# Altium PCB Upper Steer By Wire.PcbDoc
Units mm, origin at the board's own origin, x right, y up, seen from the top; angles counter-clockwise.
Board outline 70 x 50 mm, 2 copper layers (Top Layer, Bottom Layer); 11 components, 20 nets, 106 pads, 4 vias.
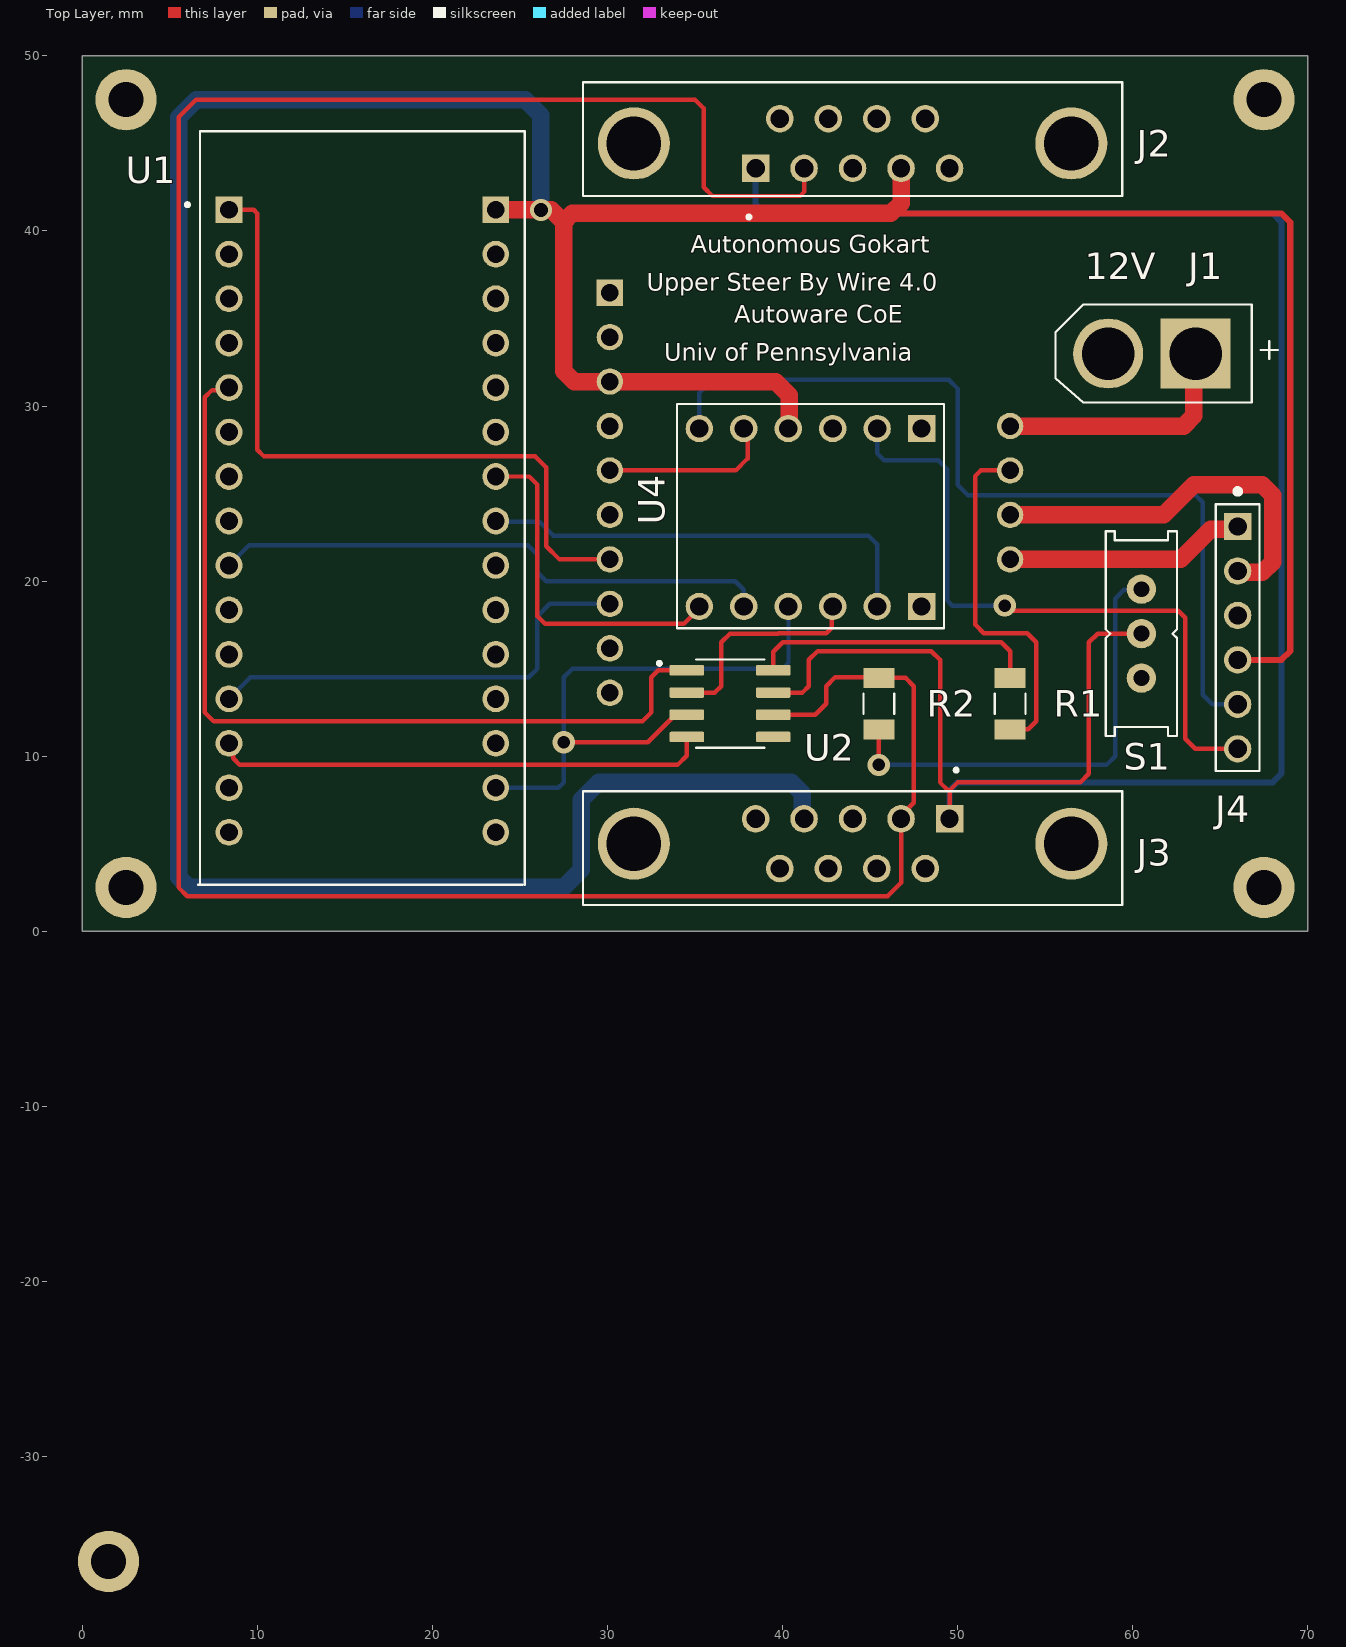
[diagram p0: Top Layer view]
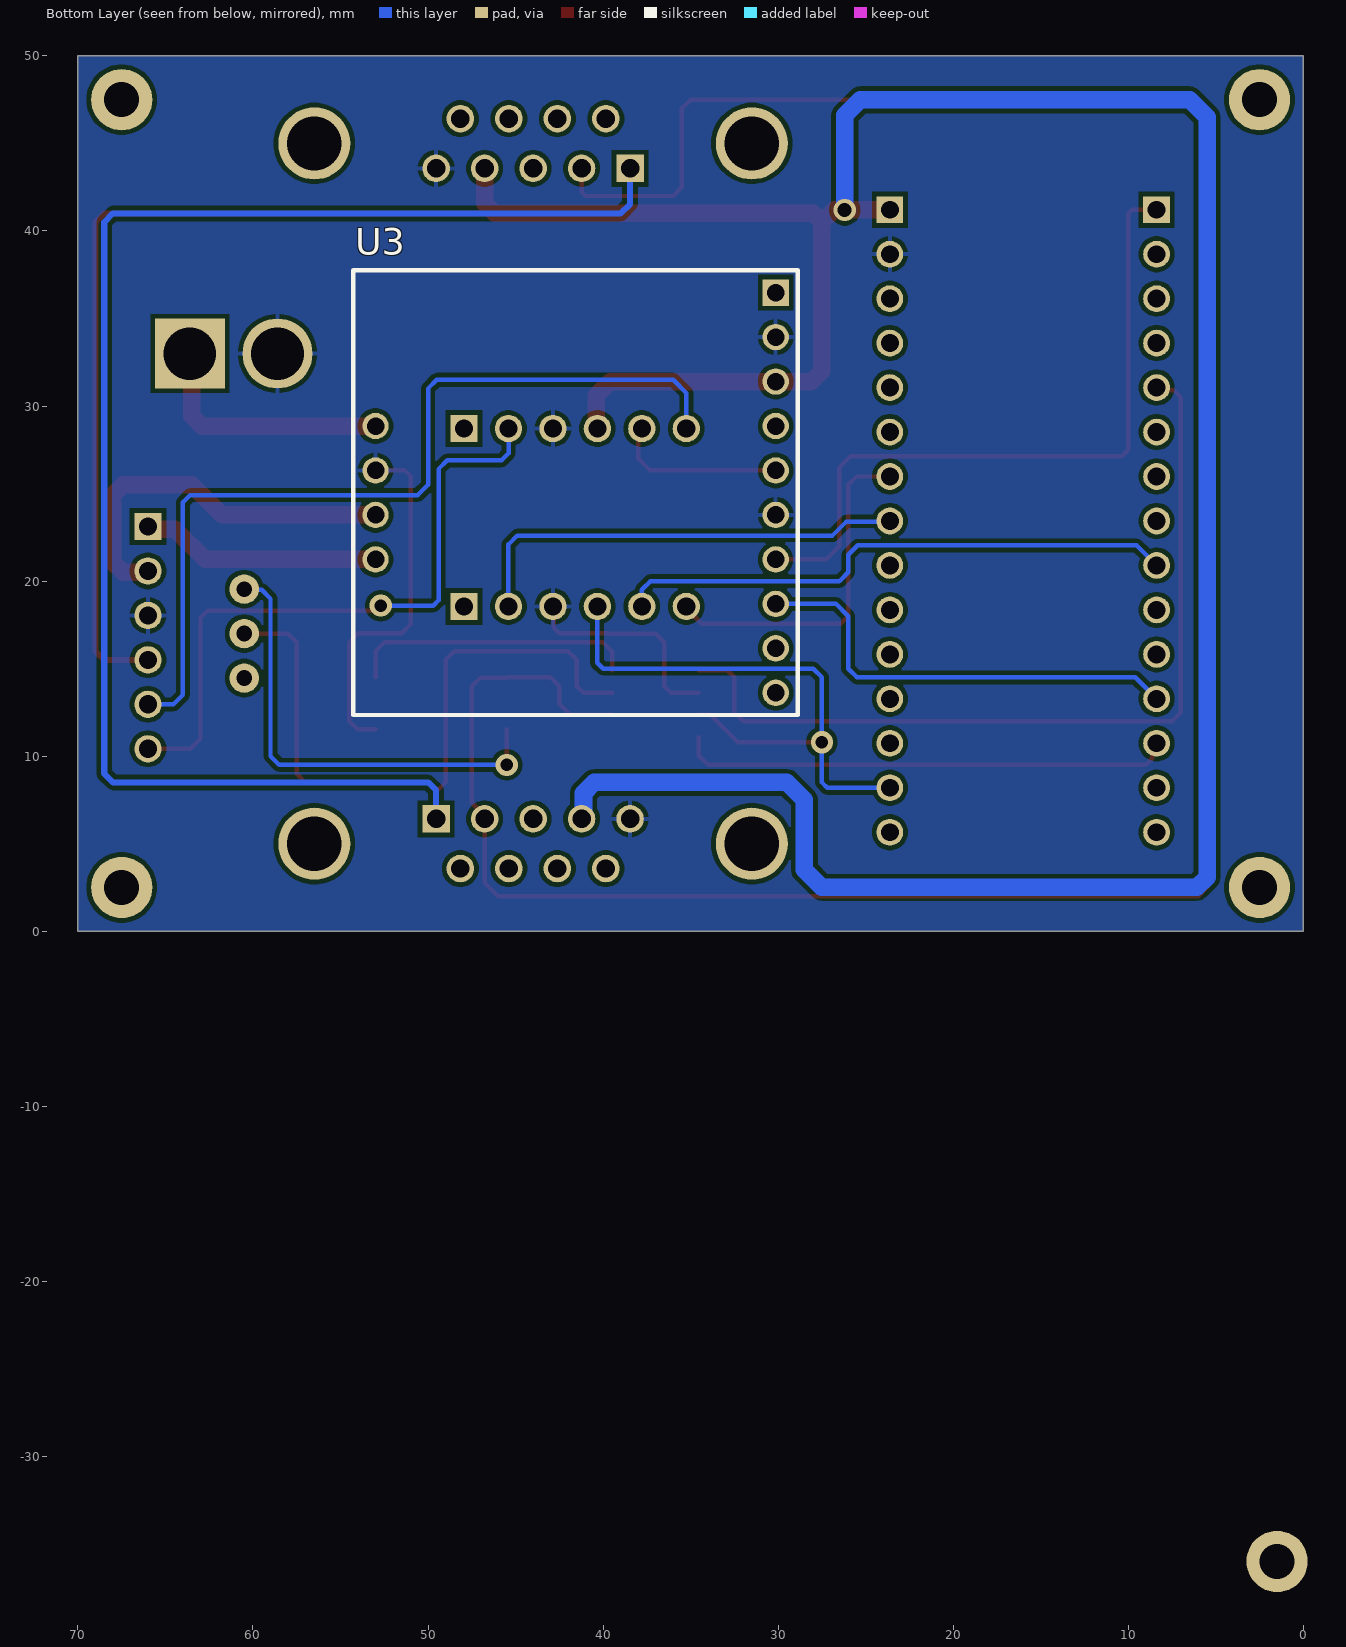
[diagram p1: Bottom Layer view, seen from below]

## Layer stack, top to bottom
Top Solder: solder mask 0.0102, Solder Resist, Dk 3.5
Top Layer: signal copper 0.0356
Dielectric 1: dielectric 0.32, FR-4, Dk 4.8
Bottom Layer: signal copper 0.0356
Bottom Solder: solder mask 0.0102, Solder Resist, Dk 3.5

## Board outline
0,0 0,50 70,50 70,0

## Design rules (kind name [scope] priority, off if disabled: settings)
Clearance [All] p1: gap=0.254 ignorepadtopadclearanceinfootprint=FALSE except(0: Arc-Hole Track-Hole SMDPad-Hole THPad-Hole Via-Hole Fill-Hole Poly-Hole Region-Hole Text-Hole)
HoleSize [All] p1: absolutevalues=TRUE maxlimit=5 minlimit=0.025 maxpercent=80.000 minpercent=20.000
PolygonConnect [All] p1: connectstyle=Relief reliefconductorwidth=0.254 reliefentries=4 polygonreliefangle="90 Angle" airgapwidth=0.254
RoutingVias [All] p1: holewidth=0.711 width=1.27 viastyle="Through Hole" minholewidth=0.711 minwidth=1.27 maxholewidth=0.711 maxwidth=1.27
SolderMaskExpansion [All] p1: expansion=0.102 istentingtop=FALSE
Width [All] p1: maxlimit=3 minlimit=0.254 preferedwidth=0.35 minimp=50.000000 maximp=50.000000 favimp=50.000000
29 further rules are at their usual default settings.

## Components (designator, comment, footprint, x,y, rotation, side; value= is the part's Value field where it differs from the comment)
J1 "XT30-M" AMASS_XT60-M 60,33 r180 top
J2 "A-DF_09_A_KG-T2S" ASSMANN_A-DF_09_A_KG-T2S 44,45 r180 top
J3 "A-DF_09_A_KG-T2S" ASSMANN_A-DF_09_A_KG-T2S 44,5 r0 top
J4 "Motor Connect" HDRV6W63P254_6X1_1524X250X950#1 66,23.12 r270 top
R1 "10K" RESC3216X65N 53,13 r270 top
R2 "120" RESC3216X65N 45.5,13 r270 top
S1 "EG1218" EG1218 60.5,17 r90 top
U1 "NUCLEO-L432KC" MODULE_NUCLEO-L432KC 16,25 r0 top
U2 "SN65HVD230QDR" SOIC127P599X175-8N 37,13 r0 top
U3 "Motor Driver" TE_826629-8 28.87,37.75 r270 bottom
U4 "826629-6" HDRV6W63P254_6X1_1524X250X950#2 47.946,18.554 r180 top

## Footprints (in the part's own frame and the unit in brackets; to place one, negate y for a bottom-side part, rotate by r counter-clockwise, add the part's x,y. Pads: shape width x height; smd on the part's side, far side on the other; paste and mask are expansions set on the pad)
AMASS_XT60-M [mm]
  round 4 hole 3: N(1.4,0)
  rect 4x4 hole 3: P(-3.6,0)
  silkscreen extent -8.3,-2.8 4.4,2.8
ASSMANN_A-DF_09_A_KG-T2S [mm]
  rect 1.575x1.575 / inner round 1.575 / far side rect 1.575x1.575 hole 1.05: 1(5.54,1.42)
  round 1.575 hole 1.05: 2(2.77,1.42) 3(0,1.42) 4(-2.77,1.42) 5(-5.54,1.42) 6(4.155,-1.42) 7(1.385,-1.42) 8(-1.385,-1.42) 9(-4.155,-1.42)
  round 4.116 hole 3.1: S1(-12.495,0) S2(12.495,0)
  silkscreen extent -15.41,-3.5 15.41,4.3
EG1218 [mil]
  round 66 hole 35.43: O(-100,0) P(0,0) S(100,0)
  silkscreen extent -230,-80 230,80
HDRV6W63P254_6X1_1524X250X950#1 [mm]
  rect 1.56x1.56 hole 1.04: 1(0,0)
  round 1.56 hole 1.04: 2(2.54,0) 3(5.08,0) 4(7.62,0) 5(10.16,0) 6(12.7,0)
  silkscreen extent -2.15,-1.25 13.97,1.25
HDRV6W63P254_6X1_1524X250X950#2 [mm]
  rect 1.56x1.56 hole 1.04: 1(0,0) 7(0,-10.16)
  round 1.56 hole 1.04: 2(2.54,0) 3(5.08,0) 4(7.62,0) 5(10.16,0) 6(12.7,0) 8(2.54,-10.16) 9(5.08,-10.16) 10(7.62,-10.16) 11(10.16,-10.16) 12(12.7,-10.16)
  silkscreen extent -1.27,-11.56 13.97,1.25
MODULE_NUCLEO-L432KC [mm]
  rect 1.53x1.53 hole 1.02: CN3_1(-7.62,16.215) CN4_1(7.62,16.215)
  round 1.53 hole 1.02: CN3_2(-7.62,13.675) CN3_3(-7.62,11.135) CN3_4(-7.62,8.595) CN3_5(-7.62,6.055) CN3_6(-7.62,3.515) CN3_7(-7.62,0.975) CN3_8(-7.62,-1.565) CN3_9(-7.62,-4.105) CN3_10(-7.62,-6.645) CN3_11(-7.62,-9.185) CN3_12(-7.62,-11.725) CN3_13(-7.62,-14.265) CN3_14(-7.62,-16.805) CN3_15(-7.62,-19.345) CN4_2(7.62,13.675) CN4_3(7.62,11.135) CN4_4(7.62,8.595) CN4_5(7.62,6.055) CN4_6(7.62,3.515) CN4_7(7.62,0.975) CN4_8(7.62,-1.565) CN4_9(7.62,-4.105) CN4_10(7.62,-6.645) CN4_11(7.62,-9.185) CN4_12(7.62,-11.725) CN4_13(7.62,-14.265) CN4_14(7.62,-16.805) CN4_15(7.62,-19.345)
  silkscreen extent -10.1,-22.35 9.27,20.7
RESC3216X65N [mm]
  rect 1.13x1.77 smd: 1(-1.47,0) 2(1.47,0)
  silkscreen extent -0.58,-0.88 0.58,0.88
SOIC127P599X175-8N [mm]
  rrect25% 1.97x0.6 smd: 1(-2.47,1.905) 2(-2.47,0.635) 3(-2.47,-0.635) 4(-2.47,-1.905) 5(2.47,-1.905) 6(2.47,-0.635) 7(2.47,0.635) 8(2.47,1.905)
  silkscreen extent -4.14,-2.52 1.95,2.52, body extent -3,-2.45 3,2.45, height 1.75
TE_826629-8 [mm]
  rect 1.508x1.508 hole 1: 1(1.27,-1.27)
  round 1.508 hole 1: 2(3.81,-1.27) 3(6.35,-1.27) 4(8.89,-1.27) 5(11.43,-1.27) 6(13.97,-1.27) 7(16.51,-1.27) 8(19.05,-1.27) 9(21.59,-1.27) 10(24.13,-1.27) 11(8.89,-24.13) 12(11.43,-24.13) 13(13.97,-24.13) 14(16.51,-24.13)
  silkscreen extent 0,-25.4 25.4,0

## Part data
J1: "Plug; DC supply; XT60; male; PIN: 2; for cable; soldered; 30A; 500V", Package=Package, Availability="Not in stock", Check_prices=https://www.snapeda.com/parts/XT60-M/AMASS/view-part/?ref=eda, MF=AMASS, MP=XT60-M, Price=None, SnapEDA_Link=https://www.snapeda.com/parts/XT60-M/AMASS/view-part/?ref=snap
J2 J3: "9 Position D-Sub Receptacle, Female Sockets Connector", Package=None, Availability="In Stock", Check_prices=https://www.snapeda.com/parts/A-DF%2009%20A/KG-T2S/Assmann+WSW+Components/view-part/?ref=eda, MF="Assmann WSW", MP="A-DF 09 A/KG-T2S", Price=None, Purchase-URL="https://pricing.snapeda.com/search/part/A-DF 09 A/KG-T2S/?ref=eda", SnapEDA_Link=https://www.snapeda.com/parts/A-DF%2009%20A/KG-T2S/Assmann+WSW+Components/view-part/?ref=snap
J4: library part 826629-6, "Conn Unshrouded Header HDR 6 POS 2.54mm Solder ST Thru-Hole Automotive Carton", Package=None, Arrow_Electronics-Purchase-URL=https://snapeda.com/shop?store=Arrow+Electronics&id=281644, Availability=Unavailable, DigiKey-Purchase-URL=https://snapeda.com/shop?store=DigiKey&id=281644, EU_RoHS_Compliance=Compliant, MF="TE Connectivity", Mouser-Purchase-URL=https://snapeda.com/shop?store=Mouser&id=281644, MP=826629-6, Price=None, SnapEDA_Link=https://www.snapeda.com/parts/826629-6/TE%20Connectivity%20AMP%20Connectors/view-part/281644/?ref=snap
R1 R2: library part KTR18EZPF9530, Package=None, Availability=Unavailable, MP=KTR18EZPF9530, Price=None
S1: "<b>SLIDING SWITCH</b><p> 0.1\" spacing through hole, vertical SPDT slide switch <p>http://www.ladyada.net/library/pcb/eaglelibrary.html</p>", Package=None, Availability=Unavailable, MP=EG1218, Price=None
U1: "STM32 Nucleo-32 development board with STM32L432KC MCU, supports Arduino connectivity", Package=None, Availability=Unavailable, MP=NUCLEO-L432KC, Price=None
U2: "3.3-V CAN Transceiver with Standby Mode 8-SOIC -40 to 125", Package="SOIC-8 Texas Instruments", Availability=Good, Check_prices=https://www.snapeda.com/parts/SN65HVD230QDR/Texas%20Instruments/view-part/1178075/?ref=eda, MF="Texas Instruments", MP=SN65HVD230QDR, Price=None, Purchase-URL=https://pricing.snapeda.com/search/part/SN65HVD230QDR/?ref=eda, SnapEDA_Link=https://www.snapeda.com/parts/SN65HVD230QDR/Texas%20Instruments/view-part/1178075/?ref=snap
U3: library part 826629-8, "Conn Unshrouded Header HDR 8 POS 2.54mm Solder ST Thru-Hole Automotive Box", Package=None, Availability=Unavailable, EU_RoHS_Compliance=Compliant, MF="TE Connectivity", MP=826629-8, Price=None, SnapEDA_Link=https://www.snapeda.com/parts/826629-8/TE%20Connectivity%20AMP%20Connectors/view-part/456641/?ref=snap, TE_purchase_URL=https://www.te.com/usa-en/product-826629-8.html?te_bu=Cor&te_type=disp&te_campaign=seda_glo_cor-seda-global-disp-prtnr-fy19-seda-model-bom-cta_sma-317_1&elqCampaignId=32493
U4: "Conn Unshrouded Header HDR 6 POS 2.54mm Solder ST Thru-Hole Automotive Carton", Package=None, Arrow_Electronics-Purchase-URL=https://snapeda.com/shop?store=Arrow+Electronics&id=281644, Availability=Unavailable, DigiKey-Purchase-URL=https://snapeda.com/shop?store=DigiKey&id=281644, EU_RoHS_Compliance=Compliant, MF="TE Connectivity", Mouser-Purchase-URL=https://snapeda.com/shop?store=Mouser&id=281644, MP=826629-6, Price=None, SnapEDA_Link=https://www.snapeda.com/parts/826629-6/TE%20Connectivity%20AMP%20Connectors/view-part/281644/?ref=snap

## Free pads (board coordinates)
  round 3.5 hole 2: 1(2.5,47.5) 2(67.5,47.5) 3(67.5,2.5) 4(2.5,2.5) 5(1.5,-36)

## Via types
v1: diameter 1.27, hole 0.711, Top Layer to Bottom Layer, 3 vias
v2: diameter 1.27, hole 0.8, Top Layer to Bottom Layer, 1 vias

## Nets (pads, with @x,y where several pads share a name; then routed paths per layer and width w, separated by ;. In a path a pad name is that pad's centre, name@x,y a point inside that pad or via, vN(x,y) a via of type N, cw(c..) or ccw(c..) an arc to the next point about the centre after c; other vN are vias at no path point)
3.3V: U1.CN4_14 U2.3 U4.4 | length 34.1
  Top Layer w0.254: v1(27.5,10.8) 32.3,10.8 33.672,12.172 33.672,12.192 33.845,12.365 U2.3
  Bottom Layer w0.254: U1.CN4_14 27.195,8.195 27.5,8.5 v1(27.5,10.8) 27.5,14.5 28,15 40,15 40.339,15.339 40.339,18.459 U4.4@40.38,18.5
5V: J2.4 J3.4 J4.4 U1.CN4_1 U3.3 U4.10 | length 213.3
  Top Layer w0.35: 46.184,41 68.5,41 69,40.5 69,16 68.5,15.5 J4.4
  Top Layer w1: U1.CN4_1 26.785,41.215 27.5,40.5 ; U4.10@40.38,28.66 40.38,30.62 39.6,31.4 U3.3 28.1,31.4 27.5,32 27.5,40.5 ; J2.4 46.77,41.586 46.184,41 28,41 27.5,40.5
  Bottom Layer w1: v2(26.2,41.2) 26.2,46.6 25.3,47.5 6.5,47.5 5.5,46.5 5.5,3.086 6.086,2.5 27.5,2.5 28.5,3.5 28.5,7.5 29.5,8.5 40.5,8.5 41.12,7.88 41.12,6.53 J3.4
12V: J1.P U3.11 | length 13.8
  Top Layer w1: U3.11 62.914,28.86 63.5,29.446 J1.P@63.5,32.5
CAN_HIGH: J2.1 J3.1 S1.P U2.7 | length 125
  Top Layer w0.254: U2.7 41.135,13.635 41.5,14 41.5,15.5 42,16 48.5,16 49,15.5 49,8.5 49.46,8.04 49.54,8.04 ; J3.1 49.54,8.04 ; S1.P 58,17 57.5,16.5 57.5,9 57,8.5 50,8.5 49.54,8.04
  Bottom Layer w0.35: J2.1 38.46,41.54 39,41 68,41 68.5,40.5 68.5,9 68,8.5 50,8.5 49.54,8.04 J3.1
CAN_LOW: J2.2 J3.2 R2.1 U2.6 | length 149.5
  Top Layer w0.254: U2.6 41.865,12.365 42.5,13 42.5,14 43,14.5 45.47,14.5 R2.1 47.03,14.47 47.5,14 47.5,7.343 46.77,6.613 46.77,2.77 46,2 6,2 5.5,2.5 5.5,46.5 6.5,47.5 35,47.5 35.5,47 35.5,42.5 36,42 41,42 41.23,42.23 J2.2
CAN_RX: U1.CN3_13 U2.4 | length 28.3
  Top Layer w0.254: U1.CN3_13 8.624,10.491 8.624,9.876 9,9.5 34,9.5 34.53,10.03 U2.4
CAN_TX: U1.CN3_5 U2.1 | length 49.7
  Top Layer w0.254: U1.CN3_5 8.236,30.911 7.411,30.911 7,30.5 7,12.5 7.5,12 32,12 32.5,12.5 32.5,14.5 32.905,14.905 U2.1
EN: U3.5 U4.11 | length 9.9
  Top Layer w0.254: U3.5 37.32,26.32 38,27 38,28.5 U4.11@37.84,28.66
EN_LOW: U1.CN3_9 U4.5 | length 32.5
  Bottom Layer w0.254: U1.CN3_9 9.526,22.041 25.459,22.041 26,21.5 26,20.5 26.5,20 37.298,20 37.786,19.512 U4.5 U4.5@37.84,18.5
ENC_A: J4.5 U4.12 | length 50.4
  Bottom Layer w0.254: U4.12 35.246,30.746 36,31.5 49.5,31.5 50,31 50,25.5 50.585,24.915 63.585,24.915 64,24.5 64,13.5 64.54,12.96 J4.5
ENC_A_LOW: U1.CN4_7 U4.6 | length 19.9
  Top Layer w0.254: U1.CN4_7 25.525,25.975 26,25.5 26,18 26.435,17.565 34.365,17.565 U4.6@35.3,18.5
ENC_B: J4.6 U4.8 | length 37.7
  Top Layer w0.254: v1(52.7,18.6) 53,18.3 62.6,18.3 63,17.9 63,11 63.58,10.42 J4.6 ; J4.6@66.3,11 J4.6@66.5,10.8
  Bottom Layer w0.254: U4.8 45.4,28.707 45.4,27.3 45.8,26.9 48.9,26.9 49.4,26.4 49.4,18.9 49.7,18.6 v1(52.7,18.6)
ENC_B_LOW: U1.CN4_8 U4.2 | length 25.9
  Bottom Layer w0.254: U1.CN4_8 23.655,23.4 26.1,23.4 26.9,22.6 44.9,22.6 45.406,22.094 U4.2
GND: J1.N J2.5 J3.5 J4.3 R1.2 U1.CN4_2 U2.2 U3.2 U3.6 U3.12 U4.3 U4.9 | length 33.2
  Top Layer w0.254: U2.2 36.135,13.635 36.5,14 36.5,16.5 37,17 39.742,17 39.758,17.016 42.5,17.016 42.823,17.339 42.823,18.403 U4.3@42.92,18.5 ; R1.2 54.03,11.53 54.5,12 54.5,16.5 53.984,17.016 51.5,17.016 51,17.516 51,26 51.32,26.32 U3.12
NetR1_1: R1.1 U2.8 | length 16.5
  Top Layer w0.254: U2.8 39.47,15.97 40.008,16.508 52.492,16.508 53,16 R1.1@53,14.5
NetR2_2: R2.2 S1.S | length 26
  Top Layer w0.254: v1@45.5,10 R2.2
  Bottom Layer w0.254: v1(45.5,9.5) 58.5,9.5 59,10 59,19 59.5,19.5 60.46,19.5 S1.S
OUT1: J4.1 U3.14 | length 13.8
  Top Layer w1: U3.14 62.74,21.24 64.469,22.969 65.849,22.969 J4.1
OUT2: J4.2 U3.13 | length 22.1
  Top Layer w1: U3.13 61.78,23.78 63.5,25.5 67.414,25.5 68,24.914 68,21.086 67.414,20.5 J4.2@65.924,20.5
PWM1: U1.CN3_12 U3.8 | length 25.8
  Bottom Layer w0.254: U1.CN3_12 9.605,14.5 25.5,14.5 26,15 26,18 26.7,18.7 U3.8
PWM2: U1.CN3_1 U3.7 | length 40.6
  Top Layer w0.254: U1.CN3_1 9.785,41.215 10,41 10,27.5 10.379,27.121 23.145,27.121 24.095,27.121 25.879,27.121 26.508,26.492 26.508,21.992 27.26,21.24 U3.7
pads on no net: J2.3 J2.6 J2.7 J2.8 J2.9 J2.S1 J2.S2 J3.3 J3.6 J3.7 J3.8 J3.9 J3.S1 J3.S2 S1.O U1.CN3_2 U1.CN3_3 U1.CN3_4 U1.CN3_6 U1.CN3_7 U1.CN3_8 U1.CN3_10 U1.CN3_11 U1.CN3_14 U1.CN3_15 U1.CN4_3 U1.CN4_4 U1.CN4_5 U1.CN4_6 U1.CN4_9 U1.CN4_10 U1.CN4_11 U1.CN4_12 U1.CN4_13 U1.CN4_15 U2.5 U3.1 U3.4 U3.9 U3.10 U4.1 U4.7

## Polygon pours and split planes (outlines as drawn)
GND on Bottom Layer "NONET_L02_P-001" (solid, pour order 0): 0,50 70,50 70,0 0,0

## Silkscreen, mask and mechanical layers (free items; w line width, h text height)
Top Overlay:
  text "Autonomous Gokart" at 34.754,38.754 h1
  text "12V" at 57.254,37.254 h1.52
  text "Upper Steer By Wire 4.0" at 32.254,36.587 h1
  text "Autoware CoE" at 37.254,34.754 h1
  text "Univ of Pennsylvania" at 33.254,32.587 h1
Mechanical 1:
  lines w0.001: 0,0 70,0 70,50 0,50 0,0
  lines w0.254: 0,0 70,0 70,50 0,50 0,0